# EAGLE board jlink_to_tag (EAGLE 9.7.0)
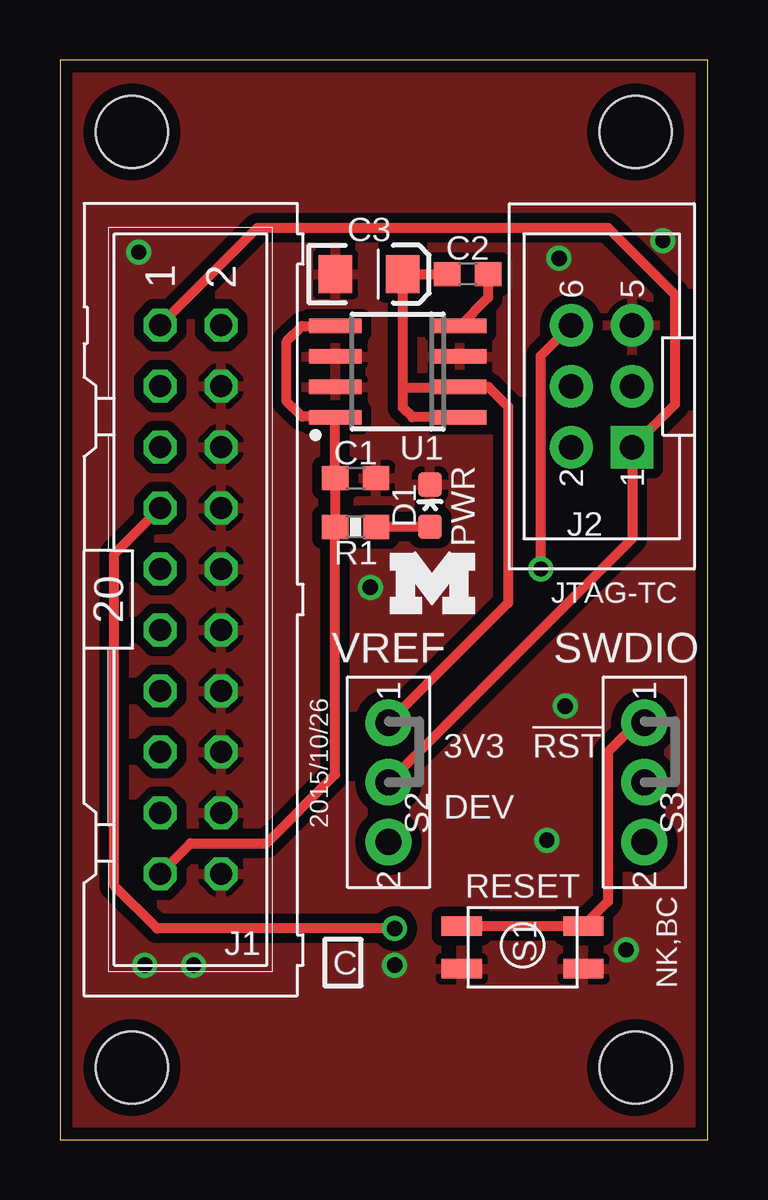
[diagram p0: board, top side]
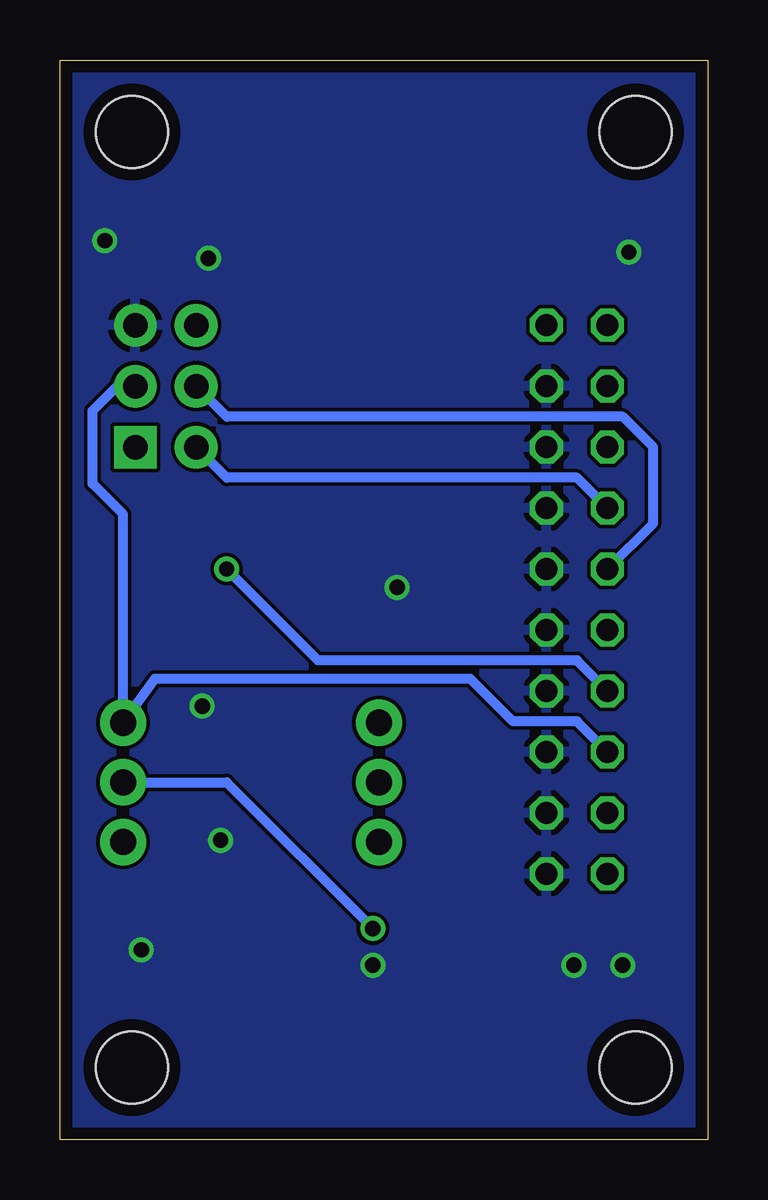
[diagram p1: board, bottom side, seen from below]

Size 27 x 45 mm. Coordinates in mm from the lower left corner, seen from the top.
Outline: 0,45 0,0 27,0 27,45 0,45
Copper layers (1*16): Top 0.0178mm / dielectric 59mil / Bottom 0.0178mm
Design rules "sunstone-2lyr_v1.0.0.3 *": minimum track width 6mil, minimum drill 14mil, track to track 6mil, track to pad 6mil, pad to pad 6mil, via to via 6mil, smd to smd 6mil, copper to edge 20mil, drill to drill 16mil, minimum pad ring 8mil, minimum via ring 8mil, stop-mask expansion 3mil, vias tented up to drill 50mil, thermal gap 10mil
Holes 3 mm at 3,42 24,42 3,3 24,3

## Footprints (pad centres in the part's own frame; a part is rotated, then mirrored left to right if it is on the bottom)
C0603 = smd 1.1 x 1: 1 -0.85,0; 2 0.85,0
EIA3216 = smd 1.4 x 1.6: A 1.4,0; C -1.4,0
LED-0603 = smd 1 x 1: A 0,-0.877; C 0,0.877
ML20 = drill 0.914 octagon: 1 -11.43,-1.27; 2 -11.43,1.27; 3 -8.89,-1.27; 4 -8.89,1.27; 5 -6.35,-1.27; 6 -6.35,1.27; 7 -3.81,-1.27; 8 -3.81,1.27; 9 -1.27,-1.27; 10 -1.27,1.27; 11 1.27,-1.27; 12 1.27,1.27; 13 3.81,-1.27; 14 3.81,1.27; 15 6.35,-1.27; 16 6.35,1.27; 17 8.89,-1.27; 18 8.89,1.27; 19 11.43,-1.27; 20 11.43,1.27
2X3_MALE_SHROUDED_0.100 = drill 1.016 pad 1.778 square: 1 -2.54,-1.27 | drill 1.016 pad 1.778: 2 -2.54,1.27; 3 0,-1.27; 4 0,1.27; 5 2.54,-1.27; 6 2.54,1.27
0603-RES = smd 1.1 x 1: 1 -0.85,0; 2 0.85,0
EVQP2 = smd 1.676 x 0.813: P$1 -2.54,-0.87; P$2 -2.54,0.908; P$3 2.54,-0.87; P$4 2.54,0.908
TE_SSA12/SPDT = drill 1.092 pad 1.93: 1 -2.489,0; 2 2.489,0; IN 0,0
SOIC8 = smd 0.6 x 2.2: 1 -1.905,-2.6; 2 -0.635,-2.6; 3 0.635,-2.6; 4 1.905,-2.6; 5 1.905,2.6; 6 0.635,2.6; 7 -0.635,2.6; 8 -1.905,2.6

## Placement (x,y rotation side)
C1  0.01uF  [C0603]  12.33,27.56 0 top
C2  0.01uF  [C0603]  17,36.07 0 top
C3  10uF  [EIA3216]  12.89,36.07 0 top
D1  BLUE  [LED-0603]  15.43,26.42 0 top
J1  [ML20]  5.45,22.51 270 top
J2  JLINK_6PIN_TAG-CON  [2X3_MALE_SHROUDED_0.100]  22.59,31.4 90 top
LOGO1  UMICH_SOLID_SMALL+  [UMICH_SOLID_100MIL]  13.75,21.9 0 top
R1  470  [0603-RES]  12.33,25.53 0 top
S1  EVQP2  [EVQP2]  19.29,8.03 180 top
S2  TE_SSA12/SPDT  [TE_SSA12/SPDT]  13.7,14.89 270 top
S3  TE_SSA12/SPDT  [TE_SSA12/SPDT]  24.37,14.89 270 top
U1  LT1763CS8-3.3  [SOIC8]  14.08,32.01 90 top

## Library data of the parts
C1 C2 = resistor; DIGIKEY: 490-1512-1-ND
C3 = SparkFun-Passives; DIGIKEY: 399-3684-1-ND
D1 = SparkFun-LED; PROD_ID: DIO-08575
J1 = con-ml; DIGIKEY: S9172-ND; OC_FARNELL: unknown; OC_NEWARK: unknown
J2 = headers; DIGIKEY: 3M15451-ND
LOGO1 = logos
R1 = SparkFun-Passives
S1 = switches; DIGIKEY: P11084SCT-ND
S2 S3 = switches; DIGIKEY: 450-1602-ND
U1 = linear-technology; DIGIKEY: LT1763CS8-3.3#TRPBFCT-ND; MPN: LT1763CS8-3.3; OC_FARNELL: 1273617; OC_NEWARK: 57M6055

## Nets
3V3: C2.1 C3.A S2.1 U1.1 U1.2
5V: C1.1 J1.19 R1.1 U1.5 U1.8
DBGRQ: J1.17
GND: C1.2 C3.C D1.C J1.4 J1.6 J1.8 J1.10 J1.12 J1.14 J1.16 J1.18 J1.20 J2.5 S1.P$2 S1.P$4 U1.3 U1.6 U1.7
N$3: D1.A R1.2
N$4: C2.2 U1.4
NRESET: J1.15 J2.3 S1.P$1 S1.P$3 S3.1
NTRST: J1.3
RTCK: J1.11
SWCLK/TCK: J1.9 J2.4
SWDIO/TMS: J1.7 J2.2 S3.IN
SWO/TDO: J1.13 J2.6
TDI: J1.5
VTREF: J1.1 J2.1 S2.IN

## Tracks (layer width: path | path; a pad name or v marks a point on that pad's centre or on a via)
3V3
  Top 0.406: U1.1 14.69,30.11 14.29,30.51 14.29,31.4 | C2.1 C3.A 14.29,31.4 | S2.1 18.68,22.36 18.68,30.56 17.87,31.38 U1.2 16.66,31.32 14.36,31.32 14.29,31.4
5V
  Top 0.406: 11.49,33.95 U1.5 10.09,33.91 9.46,33.28 9.46,30.77 10.1,30.13 11.48,30.13 | C1.1 11.48,30.13 | 11.48,30.13 U1.8 | 11.5,27.57 C1.1 | C1.1 R1.1 11.48,15.21 8.62,12.35 5.45,12.35 J1.19
GND  (via drill 0.64)
  other vias: 3.54,7.27 5.57,7.27 13.95,7.27 20.81,36.73 25.13,37.47 3.29,36.99 12.94,23.02 21.07,18.06 20.3,12.48 23.61,7.91
  pour Top (isolate 0.406): 0.2,0.2 26.8,0.2 26.8,44.8 0.2,44.8
  pour Bottom: 0.2,0.2 26.8,0.2 26.8,44.8 0.2,44.8
N$3
  Top 0.406: 15.41,25.56 D1.A 13.19,25.55 R1.2
N$4
  Top 0.406: C2.2 17.85,35.09 U1.4
NRESET
  Top 0.406: S1.P$3 S1.P$1 22.84,9.92 22.84,16.16 24.06,17.38 S3.1
  Bottom 0.406: J1.15 5.45,17.43 8.11,17.43 9.89,19.21 23.05,19.21 S3.1 24.37,26.07 25.64,27.34 25.64,30.38 24.62,31.4 J2.3
SWCLK/TCK
  Bottom 0.406: J1.9 2.27,25.68 2.27,28.86 3.54,30.13 20.05,30.13 J2.4
SWDIO/TMS  (via drill 0.64)
  Top 0.406: v13.95,8.79 4.05,8.79 2.27,10.57 2.27,24.41 J1.7
  Bottom 0.406: J1.7 5.45,27.59 20.05,27.59 J2.2 | S3.IN 20.05,14.89 v13.95,8.79
SWO/TDO  (via drill 0.64)
  Top 0.406: v20.05,23.78 20.05,32.67 J2.6
  Bottom 0.406: J1.13 5.45,19.97 16.24,19.97 v20.05,23.78
VTREF
  Top 0.406: J1.1 8.24,38 22.84,38 25.64,35.21 25.64,30.64 J2.1 23.86,25.05 S2.IN

## Text on the board
tPlace: PWR | JTAG-TC | VREF | SWDIO | 2015/10/26 | 3V3 | !RST | DEV | RESET | NK,BC | C